# EAGLE board HighLevel (EAGLE 7.1.0)
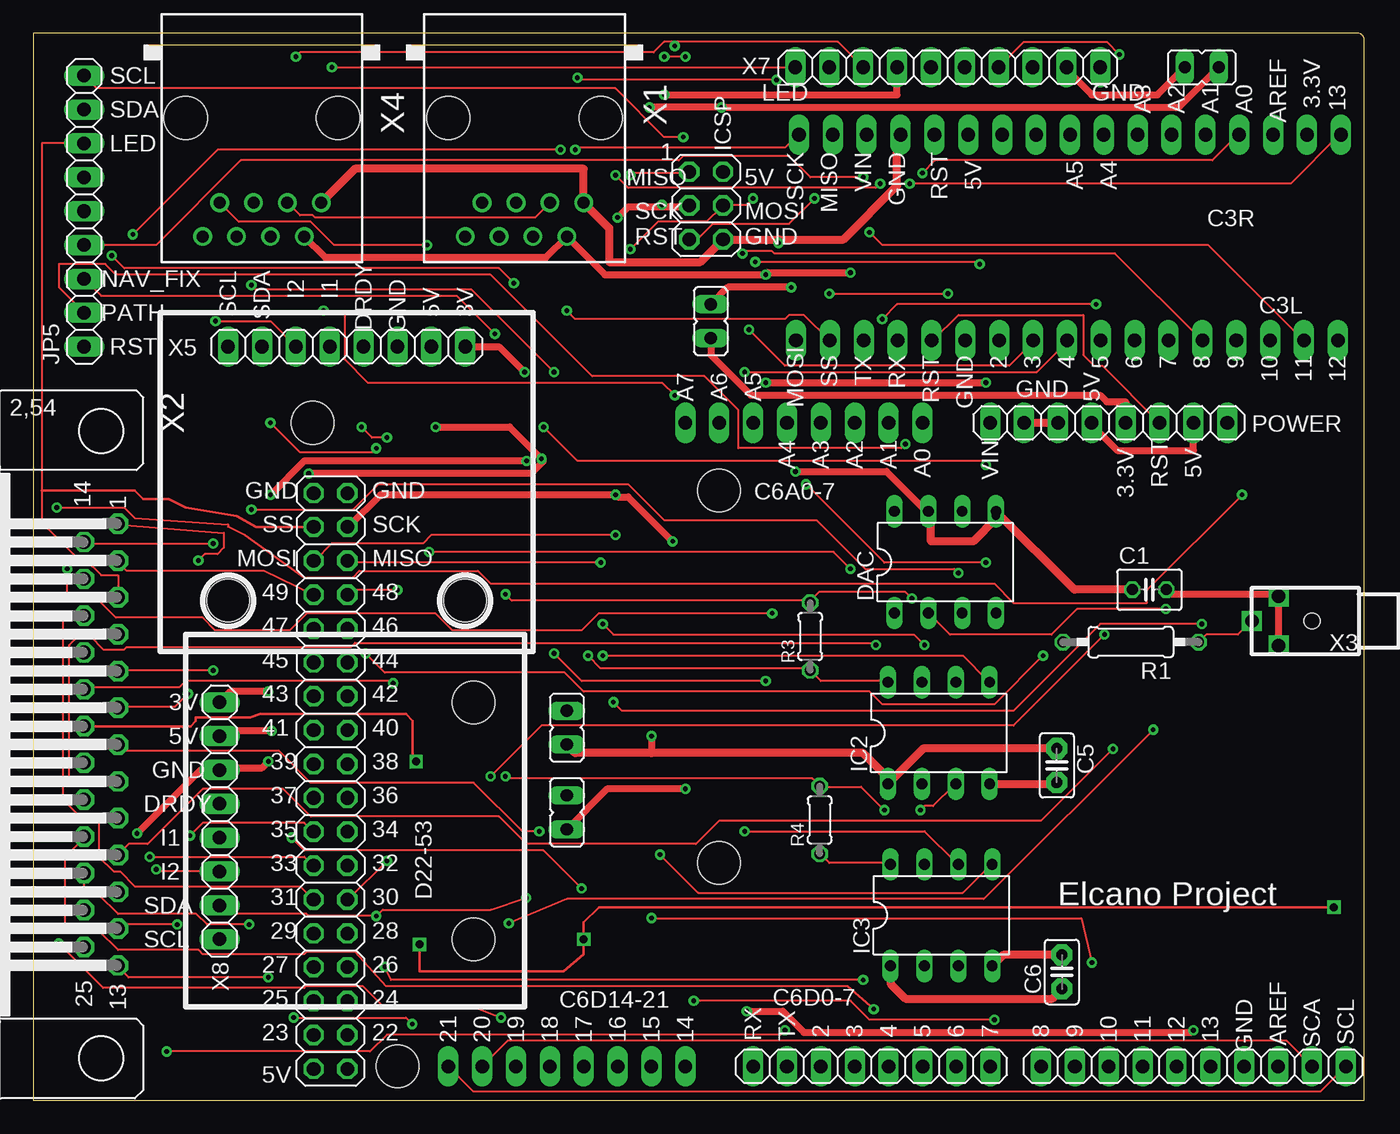
[diagram p0: board, top side]
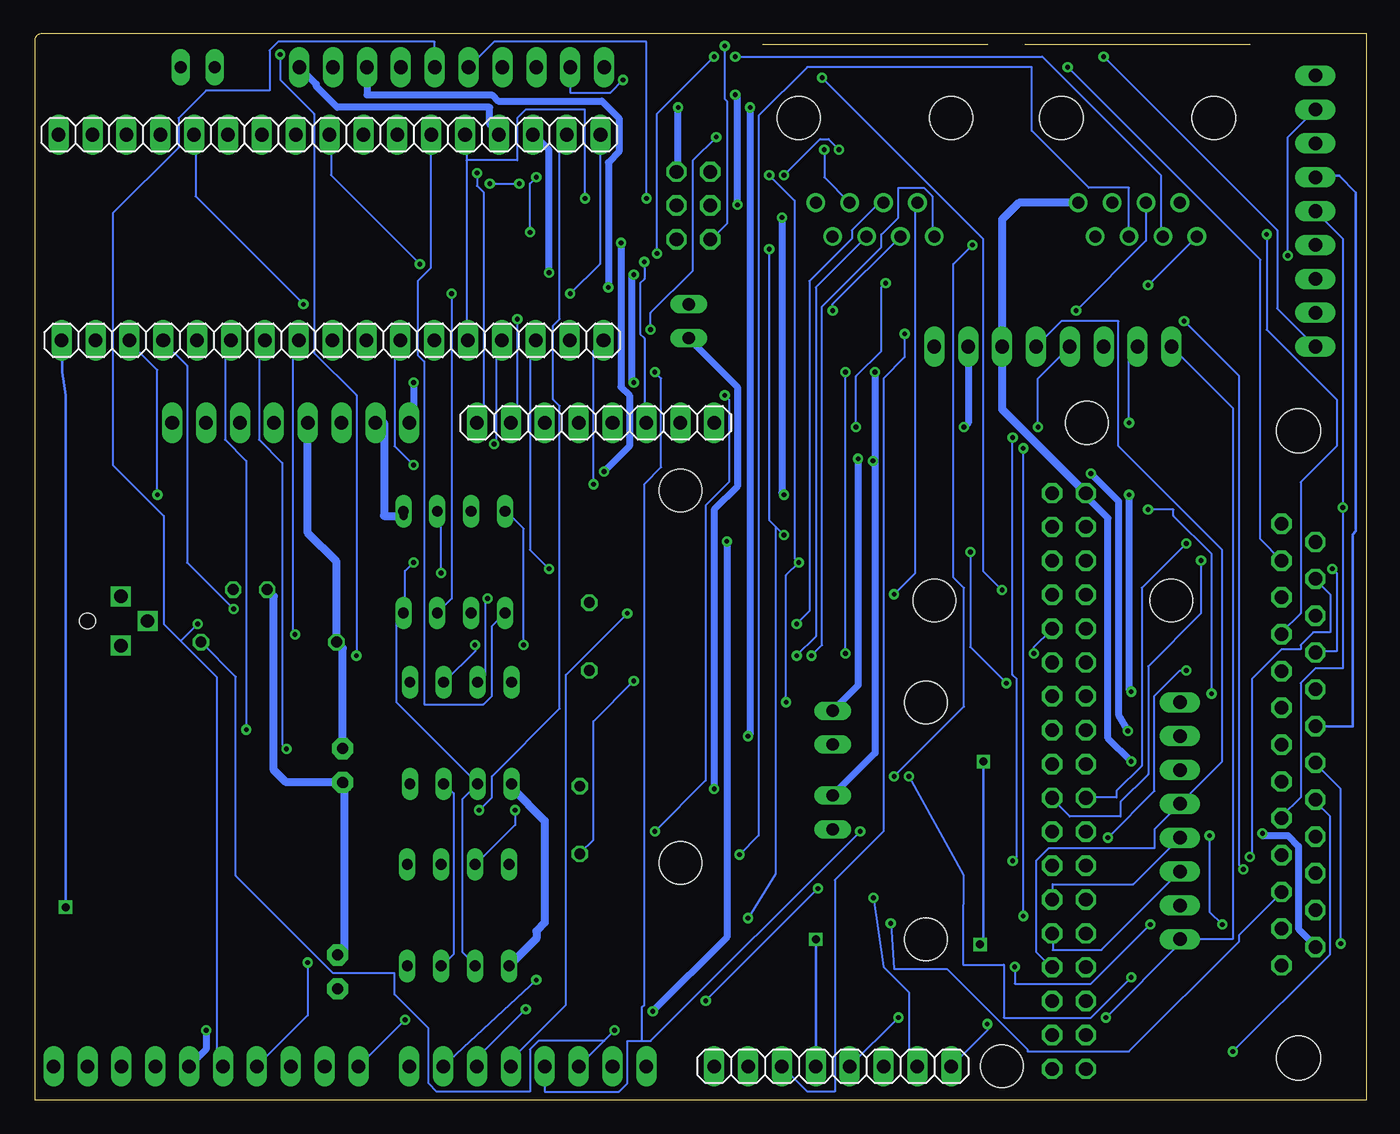
[diagram p1: board, bottom side, seen from below]

Size 99.82 x 80.01 mm. Coordinates in mm from the lower left corner, seen from the top.
Outline: 6.35,80 0,80 0,0 99.82,0 99.82,79.5 arc90 99.31,80.01 6.35,80
Copper layers (1*16): Top 0.0178mm / dielectric 59mil / Bottom 0.0178mm
Design rules "SSC-EAGLE-2Lyr_v1.0.0.3": minimum track width 6mil, minimum drill 14mil, track to track 6mil, track to pad 6mil, pad to pad 6mil, via to via 6mil, smd to smd 6mil, copper to edge 20mil, drill to drill 16mil, minimum pad ring 8mil, minimum via ring 8mil, stop-mask expansion 3mil, vias tented up to drill 0mil, thermal gap 10mil
Net classes: 0 default: width 0.152 mm, drill 0.305 mm, clearance 0.254 mm; 1 Power: width 0.508 mm, drill 0.305 mm, clearance 0.254 mm
Holes 3.2 mm at 20.95,50.8 27.3,2.54 51.44,17.78 51.44,45.72 32.38,37.47 14.61,37.47 33.02,29.84 33.02,12.06

## Footprints (pad centres in the part's own frame; a part is rotated, then mirrored left to right if it is on the bottom)
C025-030X050 = drill 0.813 octagon: 1 -1.27,0; 2 1.27,0
1X17 = drill 1.016 long: 1 -20.32,0; 2 -17.78,0; 3 -15.24,0; 4 -12.7,0; 5 -10.16,0; 6 -7.62,0; 7 -5.08,0; 8 -2.54,0; 9 0,0; 10 2.54,0; 11 5.08,0; 12 7.62,0; 13 10.16,0; 14 12.7,0; 15 15.24,0; 16 17.78,0; 17 20.32,0
C2.5-2 = drill 0.813 pad 1.6 octagon: 1 -1.27,0; 2 1.27,0
1X08 = drill 1.016 long: 1 -8.89,0; 2 -6.35,0; 3 -3.81,0; 4 -1.27,0; 5 1.27,0; 6 3.81,0; 7 6.35,0; 8 8.89,0
1X10 = drill 1.016 long: 1 -11.43,0; 2 -8.89,0; 3 -6.35,0; 4 -3.81,0; 5 -1.27,0; 6 1.27,0; 7 3.81,0; 8 6.35,0; 9 8.89,0; 10 11.43,0
2X18 = drill 1.016 octagon: 1 -21.59,-1.27; 2 -21.59,1.27; 3 -19.05,-1.27; 4 -19.05,1.27; 5 -16.51,-1.27; 6 -16.51,1.27; 7 -13.97,-1.27; 8 -13.97,1.27; 9 -11.43,-1.27; 10 -11.43,1.27; 11 -8.89,-1.27; 12 -8.89,1.27; 13 -6.35,-1.27; 14 -6.35,1.27; 15 -3.81,-1.27; 16 -3.81,1.27; 17 -1.27,-1.27; 18 -1.27,1.27; 19 1.27,-1.27; 20 1.27,1.27; 21 3.81,-1.27; 22 3.81,1.27; 23 6.35,-1.27; 24 6.35,1.27; 25 8.89,-1.27; 26 8.89,1.27; 27 11.43,-1.27; 28 11.43,1.27; 29 13.97,-1.27; 30 13.97,1.27; 31 16.51,-1.27; 32 16.51,1.27; 33 19.05,-1.27; 34 19.05,1.27; 35 21.59,-1.27; 36 21.59,1.27
DIL08 = drill 0.813 long: 1 -3.81,-3.81; 2 -1.27,-3.81; 3 1.27,-3.81; 4 3.81,-3.81; 5 3.81,3.81; 6 1.27,3.81; 7 -1.27,3.81; 8 -3.81,3.81
2X03 = drill 1.016 octagon: 1 -2.54,-1.27; 2 -2.54,1.27; 3 0,-1.27; 4 0,1.27; 5 2.54,-1.27; 6 2.54,1.27
JP1 = drill 0.914 long: 1 0,-1.27; 2 0,1.27
1X09 = drill 1.016 long: 1 -10.16,0; 2 -7.62,0; 3 -5.08,0; 4 -2.54,0; 5 0,0; 6 2.54,0; 7 5.08,0; 8 7.62,0; 9 10.16,0
0207/10 = drill 0.813 octagon: 1 -5.08,0; 2 5.08,0
0204/5 = drill 0.813 octagon: 1 -2.54,0; 2 2.54,0
RJ45-NO-SHIELD = drill 0.9 pad 1.4: 1 -4.445,6.35; 2 -3.175,8.89; 3 -1.905,6.35; 4 -0.635,8.89; 5 0.635,6.35; 6 1.905,8.89; 7 3.175,6.35; 8 4.445,8.89 | hole 3.251: -5.715,0; 5.715,0
M25H = drill 1.016 octagon: 1 -16.561,1.27; 2 -13.792,1.27; 3 -11.049,1.27; 4 -8.28,1.27; 5 -5.512,1.27; 6 -2.769,1.27; 7 0,1.27; 8 2.769,1.27; 9 5.512,1.27; 10 8.28,1.27; 11 11.049,1.27; 12 13.792,1.27; 13 16.561,1.27; 14 -15.189,-1.27; 15 -12.421,-1.27; 16 -9.652,-1.27; 17 -6.909,-1.27; 18 -4.14,-1.27; 19 -1.372,-1.27; 20 1.372,-1.27; 21 4.14,-1.27; 22 6.909,-1.27; 23 9.652,-1.27; 24 12.421,-1.27; 25 15.189,-1.27 | hole 3.302: 23.52,0; -23.52,0
ODO_JACK = drill 1 square: P$1 4.5,0; P$2 2.5,1.85; P$3 2.5,-1.85 | hole 1.2: 0,0

## Placement (x,y rotation side)
C1  1 uF  [C025-030X050]  83.69,38.29 0 top
C3L  Pilot digital  [1X17]  77.51,56.98 180 bottom
C3R  Pilot analog  [1X17]  77.73,72.41 180 bottom
C5  0.1uF  [C2.5-2]  76.75,25.11 270 top
C6  0.1uF  [C2.5-2]  77.13,9.62 90 top
C6A0-7  C6 Analog In 0-7  [1X08]  57.78,50.8 0 bottom
C6D0-7  GPS  [1X08]  62.87,2.54 180 top
C6D8-13  C6D8-13  [1X10]  87,2.54 180 top
C6D14-21  GPS  [1X08]  40.01,2.54 0 bottom
D22-53  High digital  [2X18]  22.29,23.94 90 top
DAC  MCP 4802  [DIL08]  68.39,40.35 0 top
IC2  DS 8291  [DIL08]  67.9,27.53 0 top
IC3  DS 8291  [DIL08]  68.09,13.88 0 top
ICSP  C6  [2X03]  50.45,67.09 270 top
JP1  5V_JP1  [JP1]  40.01,27.94 0 top
JP2  3V3_JP2  [JP1]  40.01,21.59 0 top
JP3  5V_JP3  [JP1]  87.63,77.47 90 top
JP4  3V3_JP4  [JP1]  50.8,58.42 0 top
JP5  C4 Mapper  [1X09]  3.81,66.67 90 top
POWER  C6 Power  [1X08]  80.64,50.8 0 top
R1  4.7 K  [0207/10]  82.3,34.35 180 top
R3  100  [0204/5]  58.26,34.78 90 top
R4  100  [0204/5]  58.97,21.02 90 top
X1  RJ45-8L-B  [RJ45-NO-SHIELD]  36.83,73.66 180 top
X2  Vehicle control  [M25H]  5.08,26.67 270 top
X3  2odo__  [ODO_JACK]  95.89,35.94 180 top
X4  RJ45-8L-B  [RJ45-NO-SHIELD]  17.14,73.66 180 top
X5  Compass  [1X08]  23.5,56.52 0 top
X7  Mouse  [1X10]  68.58,77.47 180 top
X8  Digital Compass  [1X08]  13.97,20.95 90 top

## Library data of the parts
C1 R1 = rcl
C3L C3R C6A0-7 C6D0-7 C6D8-13 C6D14-21 D22-53 ICSP JP5 POWER X5 X7 X8 = pinhead
C5 C6 = capacitor-wima
DAC IC2 IC3 = ic-package
JP1-JP4 = jumper
R3 R4 = resistor
X1 X4 = con-tycoelectronics; MF: TYCO ELECTRONICS; MPN: RJ45-8L-B; OC_FARNELL: 1279843; OC_NEWARK: 52K4445
X2 = con-subd; OC_FARNELL: unknown; OC_NEWARK: unknown
X3 = Elcano

## Nets
2TX6RX: C3L.17 C6D14-21.4 JP5.6 X2.19
3MISO: C3R.2 IC2.3 IC3.3
3MOSI: C3L.1 DAC.4 IC2.2 IC3.2
3SCK: C3R.1 DAC.3 X1.3 X4.3
3SCL: C3L.8 JP5.9
3SDA: C3L.7 JP5.8
3SS5R: C3L.13 X4.6
3SS_DAC: C3L.14 DAC.2
3TX2RX: C3L.3 X2.18
3V3 [Power]: JP2.1 JP4.1 POWER.5
3VLSM [Power]: JP2.2 X5.8 X8.8
5V_C3: C3R.6 DAC.1
5VLSM [Power]: JP1.2 X5.7 X8.7
6MISO: C6D8-13.6 D22-53.31 ICSP.1 X7.5
6MOSI: C6D8-13.7 D22-53.32 ICSP.4 X7.6
6SCL: C6D8-13.1 C6D14-21.8 X5.1 X8.1
6SDA: C6D8-13.2 C6D14-21.7 X5.2 X8.2
6TX2RX: C6D14-21.5 X2.20
+5V [Power]: C5.1 C6.1 IC2.1 IC3.1 ICSP.2 JP1.1 JP3.1 POWER.4 POWER.7 R1.2
A0: C3R.14 C6A0-7.1
A1: C3R.13 C6A0-7.2
A5: C3R.9 C6A0-7.6
ACK26: C6D0-7.4 X2.17
ACK34: C3L.15 JP5.5 X2.9
ACK43: C3L.16 JP5.4
ACK62: C6D0-7.3 X2.22
AUTREQ: C3L.9 C6D0-7.5 X2.7
CLICK: C6D0-7.6 R1.1 X2.21 X3.P$1
CRS_RVS: C3L.10 X2.13
CRSSTR: DAC.6 X2.6
CRSTHR: DAC.8 X2.8
D09: D22-53.18 X2.14
DRDY: D22-53.7 X5.5 X8.5
GND [Power]: C1.1 C3R.4 C5.2 C6.2 D22-53.36 DAC.5 DAC.7 IC2.4 IC3.4 ICSP.6 POWER.2 POWER.3 X1.1 X2.25 X4.1 X5.6 X7.1 X8.6
I1LSM: D22-53.11 X5.4 X8.4
I2LSM: D22-53.9 X5.3 X8.3
LED1: C6D8-13.10 X2.5
LED3: C3R.17 X2.4
LED4: D22-53.34 JP5.7 X2.3
LED5: D22-53.30 X2.2 X7.10
LED6: D22-53.17 X2.1
LED7: D22-53.14 X2.15
LED8: D22-53.12 X2.16
M3V [Power]: JP4.2 X7.3
M5V [Power]: JP3.2 X7.2
MANRQ: C3L.11 X2.10
MISO+: IC2.6 X1.5
MISO+R: IC3.6 X4.5
MISO-: IC2.5 X1.4
MISO-R: IC3.5 X4.4
MOSI+: IC2.8 R3.1 X1.8
MOSI+R: IC3.8 R4.1 X4.8
MOSI-: IC2.7 R3.2 X1.7
MOSI-R: IC3.7 R4.2 X4.7
N$4: C3L.2 X1.6
N$23 [Power]: C1.2 X3.P$2 X3.P$3
NAV_FIX: C6D14-21.3 JP5.3
NCS: D22-53.27 X7.4
NPO: D22-53.29 X7.9
PATH: C3L.4 JP5.2
RDY26: D22-53.16 X2.12
RDY32: C3L.12 X2.11
RDY62: C6D0-7.2 X2.23
RESET: C3L.5 C3R.5 ICSP.5 JP5.1 POWER.6 X7.8
SCLK [Power]: C6D8-13.5 D22-53.33 ICSP.3 X7.7
VIN [Power]: C3R.3 POWER.1 X1.2 X4.2

## Tracks (layer width: path | path; a pad name or v marks a point on that pad's centre or on a via)
2TX6RX  (via drill 0.6)
  Top 0.203: v97.54,14.48 42.42,14.48 41.27,13.34 v41.27,12.06 41.27,10.92 39.75,9.65 28.96,9.65 v28.96,11.68 | X2.19 11.79,28.04 12.19,28.45 12.19,28.7 16.26,28.7 17.02,28.96 27.94,28.96 28.45,28.45 28.45,25.65 v28.7,25.4
  Bottom 0.203: C6D14-21.4 v41.27,12.06 | v97.54,14.48 97.54,52.83 97.79,54.61 97.79,56.95 C3L.17 | X2.19 1.02,28.04 1.02,42.42 0.76,42.67 0.76,68.07 2.03,69.34 3.68,69.34 JP5.6 | v28.7,25.4 28.7,11.94 v28.96,11.68
3MISO  (via drill 0.36)
  Top 0.152: v66.52,21.75 66.83,22.07 67.47,22.07 69.06,23.65 IC2.3
  Bottom 0.152: IC3.3 69.22,10.16 68.42,10.95 68.42,23.02 69.06,23.65 IC2.3 | v66.52,21.75 65.56,22.7 65.56,24.29 60.48,29.37 60.48,52.07 60.96,52.55 60.96,58.1 60.48,58.58 60.48,71.91 60.01,72.39 C3R.2
3MOSI  (via drill 0.36)
  Top 0.152: v57.94,46.2 63.82,40.32 v71.44,40.32
  Bottom 0.152: IC3.2 66.83,10.16 67.79,11.11 67.79,22.54 66.67,23.65 IC2.2 66.67,23.81 72.71,29.84 72.71,36.04 72.23,36.51 DAC.4 72.07,36.67 72.07,39.69 v71.44,40.32 | v57.94,46.2 57.94,56.2 57.31,56.83 C3L.1
3SCK  (via drill 0.36)
  Top 0.152: X4.3 20,66.36 20.95,66.36 21.11,66.2 37.62,66.2 X1.3 | v59.69,60.48 v68.58,60.48 | v40.64,71.28 40.8,71.44 56.36,71.44 57.31,72.39 C3R.1
  Bottom 0.152: v68.58,60.48 68.58,37.62 69.53,36.67 DAC.3 | v59.69,60.48 57.47,62.71 57.47,72.39 C3R.1 | X1.3 40.64,69.22 v40.64,71.28
3SCL  (via drill 0.36)
  Top 0.152: JP5.9 4.76,75.88 43.66,75.88 47.31,72.23 v48.74,72.23 | v53.66,57.78 56.36,55.09 73.18,55.09 74.93,56.83 C3L.8
  Bottom 0.152: v48.74,72.23 50.48,70.48 50.48,62.23 53.66,59.05 v53.66,57.78
3SDA  (via drill 0.36)
  Top 0.152: v5.87,63.34 6.83,62.39 34.92,62.39 v36.04,61.28 | v38.26,50.48 40.8,47.94 71.12,47.94 v71.44,47.62
  Bottom 0.152: JP5.8 5.87,72.23 v5.87,63.34 | v36.04,61.28 36.35,60.96 36.35,56.2 38.26,54.29 v38.26,50.48 | v71.44,47.62 72.87,49.05 72.87,56.52 72.55,56.83 C3L.7
3SS5R  (via drill 0.36)
  Top 0.152: v48.9,78.26 v47.31,78.26 | v53.18,63.5 53.34,63.66 55.4,63.66 55.56,63.5 81.12,63.5 87.63,56.99 C3L.13
  Bottom 0.152: X4.6 15.4,64.93 15.4,69.37 24.29,78.26 v47.31,78.26 | v48.9,78.26 53.18,73.98 v53.18,63.5
3SS_DAC  (via drill 0.36)
  Top 0.152: v84.93,36.83 78.26,36.83 76.36,34.92 68.74,34.92 67.15,36.51 DAC.2
  Bottom 0.152: v84.93,36.83 88.42,40.32 88.42,55.09 90.17,56.83 C3L.14
3TX2RX  (via drill 0.36)
  Top 0.152: v26.99,31.27 26.83,31.43 11.43,31.43 10.95,30.96 3.81,30.96 X2.18 | v29.69,41.12 60.01,41.12 v61.28,39.85
  Bottom 0.152: v26.99,31.27 29.69,33.97 v29.69,41.12 | v61.28,39.85 62.71,41.27 62.71,56.52 62.39,56.83 C3L.3
3V3  (via drill 0.36)
  Top 0.508: JP2.1 43.02,23.34 v48.9,23.34 | POWER.5 81.92,52.39 80.49,52.39 80.01,52.86 53.82,52.86 50.8,55.88 JP4.1
  Bottom 0.508: v48.9,23.34 48.9,44.29 47.15,46.04 47.15,53.5 JP4.1
3VLSM  (via drill 0.36)
  Top 0.508: v36.83,54.61 34.92,56.52 X5.8 | X8.8 14.76,30.64 v17.62,30.64 | v17.78,45.4 20.32,47.94 v36.99,47.94
  Bottom 0.508: JP2.2 36.83,26.04 36.83,47.94 | v36.83,54.61 36.83,47.94 | v17.62,30.64 17.78,30.8 v17.78,45.4 | v36.99,47.94 36.83,47.94
5V_C3
  Bottom 0.152: DAC.1 64.61,36.51 65.56,35.56 65.56,30.32 66.2,29.69 70.64,29.69 70.64,55.4 71.12,55.88 71.12,61.44 70.17,62.39 70.17,72.39 C3R.6
5VLSM  (via drill 0.36)
  Top 0.508: v30.16,50.48 35.72,50.48 v38.1,48.1 38.26,47.94 37.31,46.99 v20.64,46.99 | X8.7 14.86,27.69 v17.88,27.69
  Bottom 0.508: JP1.2 38.1,31.11 v38.1,48.1 | v30.16,50.48 29.84,50.8 X5.7 | v17.88,27.69 18.57,28.89 18.57,44.93 v20.64,46.99
6MISO  (via drill 0.36)
  Top 0.152: v42.55,40.32 23.65,40.32 D22-53.31 | v44.77,69.37 44.93,69.53 49.05,69.53 ICSP.1 | v43.5,29.84 44.13,29.21 73.5,29.21 80.01,35.72 v87.63,35.72
  Bottom 0.152: v44.77,69.37 42.86,67.47 42.86,40.64 v42.55,40.32 43.5,39.37 v43.5,29.84 | C6D8-13.6 86.2,3.02 86.2,31.75 88.9,34.45 | 88.9,34.45 90.17,35.72 90.17,43.81 93.98,47.62 93.98,66.52 89.06,71.44 89.06,73.66 87,75.72 82.23,75.72 82.23,78.74 81.6,79.38 69.85,79.38 X7.5 | 88.9,34.45 v87.63,35.72
6MOSI  (via drill 0.36)
  Top 0.152: v43.66,42.39 29.84,42.39 29.21,41.75 22.38,41.75 21.11,40.48 D22-53.32 | v44.77,63.82 46.83,65.88 50.48,65.88 51.59,66.99 ICSP.4 51.75,67.15 53.5,67.15 v53.98,67.63 | v79.38,10.32 78.58,13.65 v46.35,13.65
  Bottom 0.152: 44.29,43.02 44.77,43.5 v44.77,63.82 | 44.29,43.02 v43.66,42.39 | C6D8-13.7 79.38,6.35 v79.38,10.32 | v46.35,13.65 44.29,16.99 44.29,43.02 | X7.6 65.41,79.38 53.98,79.38 v53.98,67.63
6SCL  (via drill 0.36)
  Top 0.152: C6D8-13.1 96.52,0.64 33.02,0.64 C6D14-21.8 | v28.42,5.71 27.94,6.19 v19.53,6.19
  Bottom 0.152: X5.1 10,51.91 10,12.06 X8.1 13.97,11.75 v19.53,6.19 | C6D14-21.8 28.42,5.24 v28.42,5.71
6SDA  (via drill 0.36)
  Top 0.152: C6D8-13.2 93.98,4.45 35.56,4.45 C6D14-21.7 | X8.2 14.61,13.97 20.48,13.97 20.64,13.81 v25.72,13.81 26.19,14.29 34.29,14.29 v36.96,15.18 | v17.78,50.8 20,48.58 25.4,48.58 v25.72,48.9
  Bottom 0.152: X5.2 17.78,55.88 v17.78,50.8 | v25.72,13.81 v25.72,48.9 | C6D14-21.7 34.29,3.17 34.29,8.1 36.2,10 v36.96,15.18
6TX2RX  (via drill 0.36)
  Top 0.152: v1.91,11.75 5.24,8.41 20.32,8.41 20.48,8.57 24.7,8.57 26.16,7.11 32.96,7.05 v35.08,6.19
  Bottom 0.152: v1.91,11.75 1.91,23.34 3.81,25.24 X2.20 | v35.08,6.19 C6D14-21.5
+5V  (via drill 0.36)
  Top 0.508: POWER.7 87,48.74 81.28,48.74 79.38,50.64 POWER.4 | JP3.1 85.88,74.45 v51.59,74.45 v46.2,74.45 | v46.35,27.3 46.35,26.04
  Top 0.61: C5.1 66.75,26.38 IC2.1 64.09,24.17 62.23,26.04 46.35,26.04 40.64,26.04 JP1.1 | IC3.1 64.28,8.74 65.41,7.62 76.4,7.62 C6.1
  Bottom 0.508: v51.59,74.45 51.59,69.69 ICSP.2 | v46.35,27.3 46.2,27.46 v46.2,74.45
  Bottom 0.61: C5.1 76.75,33.89 R1.2 77.22,40.39 79.38,42.55 POWER.4 | IC2.1 64.09,23.45 61.59,20.95 61.59,13.34 62.23,12.7 62.23,12.12 IC3.1
A0  (via drill 0.36)
  Top 0.152: v66.67,69.53 67.63,70.48 88.42,70.48 90.33,72.39 C3R.14
  Bottom 0.152: C6A0-7.1 66.2,51.28 66.2,68.1 66.67,68.58 v66.67,69.53
A1  (via drill 0.36)
  Top 0.152: v63.66,58.58 64.77,59.69 v79.69,59.69
  Bottom 0.152: C6A0-7.2 63.66,51.28 v63.66,58.58 | v79.69,59.69 87.79,67.79 87.79,72.39 C3R.13
A5  (via drill 0.36)
  Top 0.152: v54.13,62.87 70.8,62.87 v70.96,62.71
  Bottom 0.152: C6A0-7.6 54.13,50.96 54.13,57.15 54.45,57.47 54.45,61.28 54.13,61.59 v54.13,62.87 | v70.96,62.71 77.63,69.37 77.63,72.39 C3R.9
ACK26  (via drill 0.36)
  Top 0.152: v2.54,39.85 2.54,37.47 4.92,37.47 6.19,36.2 12.7,36.2 13.65,35.24 19.21,35.24 20.48,36.51 30.16,36.51 31.43,35.24 41.12,35.24 42.39,36.51 v55.4,36.51
  Bottom 0.152: v2.54,39.85 2.22,39.53 2.22,33.66 3.81,33.66 X2.17 | v55.4,36.51 60.01,31.91 60.01,7.14 64.14,3.02 C6D0-7.4
ACK34  (via drill 0.36)
  Top 0.152: v90.65,45.4 83.5,38.26 83.5,37.31 73.5,37.31 72.07,38.73 34.29,38.73 33.34,39.69 24.45,39.69 23.97,39.21 20.32,39.21 15.88,42.39 14.61,43.02 14.61,43.18 7.62,43.66 6.83,44.45 v1.75,44.45
  Bottom 0.152: JP5.5 1.75,64.61 v1.75,44.45 1.75,32.38 3.81,32.38 4.92,31.27 4.92,22.7 6.35,21.27 X2.9 | v90.65,45.4 90.65,54.77 92.71,56.83 C3L.15
ACK43  (via drill 0.36)
  Top 0.152: JP5.4 9.21,64.14 15.56,70.48 48.42,70.48 48.74,70.8 56.67,70.8 58.26,69.22 v62.23,69.22 | v62.71,65.09 63.66,64.14 88.11,64.14 95.25,56.99 C3L.16
  Bottom 0.152: v62.23,69.22 62.71,68.74 v62.71,65.09
ACK62  (via drill 0.36)
  Top 0.152: v63.02,6.83 61.05,8.54 26.45,8.54 24.13,11.11 20.48,11.11 20.32,10.95 12.7,10.95 12.38,11.27 6.35,11.27 4.92,12.7 2.38,12.7 2.38,18.26 3.81,19.68 X2.22
  Bottom 0.152: v63.02,6.83 66.67,3.17 C6D0-7.3
AUTREQ  (via drill 0.36)
  Top 0.152: X2.7 6.83,26.19 18.41,26.19 20.8,23.81 33.02,23.81 36.67,20.16 v37.94,20.16 | v53.34,54.61 75.25,54.61 77.47,56.83 C3L.9
  Bottom 0.152: v37.94,20.16 53.66,4.45 54.29,4.45 | 54.29,4.45 55.4,4.45 55.4,1.27 56.04,0.64 61.59,0.64 C6D0-7.5 | v53.34,54.61 52.86,54.13 52.86,47.47 54.13,46.2 54.13,7.14 54.29,6.99 54.29,4.45
CLICK  (via drill 0.36)
  Top 0.152: R1.1 87.95,34.92 90.33,34.92 91.28,35.88 X3.P$1 | v10,3.65 25.24,3.65 26.51,4.92 56.04,4.92 v56.36,5.24
  Bottom 0.152: v10,3.65 2.7,10.95 2.7,21.27 3.81,22.38 X2.21 | C6D0-7.6 57.15,4.45 | 57.15,4.45 v56.36,5.24 | R1.1 84.77,31.75 84.77,16.83 77.47,9.53 72.87,9.53 72.87,7.94 70.33,5.4 70.33,1.27 69.69,0.64 62.71,0.64 62.71,3.81 62.07,4.45 57.15,4.45
CRS_RVS  (via drill 0.36)
  Top 0.152: v17.62,9.21 7.14,9.21 6.35,10 X2.13 | v34.29,24.29 38.1,28.1 73.5,28.1 v80.33,34.92
  Bottom 0.152: v17.62,9.21 20.64,6.19 27.18,6.19 27.18,10.16 30.23,10.16 30.23,12.45 30.19,16.89 v34.29,24.29 | v80.33,34.92 80.49,35.08 80.49,56.52 80.17,56.83 C3L.10
CRSSTR  (via drill 0.36)
  Top 0.152: v69.37,39.53 69.06,39.85 62.39,39.85 58.74,43.5 47.31,43.5 44.61,46.2 25.88,46.2 23.97,44.29 v16.35,44.29 | v11.59,30.48 10.64,29.53 6.35,29.53 X2.6
  Bottom 0.152: v69.37,39.53 69.37,43.97 69.53,44.13 DAC.6 | v16.35,44.29 14.45,44.29 14.45,43.81 11.59,40.96 v11.59,30.48
CRSTHR  (via drill 0.36)
  Top 0.152: v63.18,34.13 63.02,34.29 24.13,34.29 23.81,33.97 6.99,33.97 6.83,33.81 5.24,33.81 4.29,34.77 3.33,34.77 2.7,34.13 2.7,23.97 6.35,23.97 X2.8
  Bottom 0.152: v63.18,34.13 63.18,42.86 64.45,44.13 DAC.8
D09  (via drill 0.36)
  Top 0.152: v13.49,41.75 3.81,41.75 X2.14
  Bottom 0.152: v13.49,41.75 16.83,38.42 16.83,25.08 18.73,23.18 18.73,22.7 20.95,22.7 D22-53.18
DRDY
  Bottom 0.152: D22-53.7 23.65,10 24.77,11.11 24.77,17.94 23.81,18.89 15.88,18.89 15.88,20.32 X8.5 10.79,25.4 10.79,41.27 18.57,49.05 18.57,58.42 22.86,58.42 X5.5
GND  (via drill 0.36, 0.6)
  Top 0.508: v7.78,20 12.54,24.77 X8.6 14.13,24.92 17.14,24.92 v17.62,25.4 | v57.15,47.15 63.98,47.15 66.83,44.29 DAC.7 | v55.88,64.29 55.88,64.55
  Top 0.61: C3R.4 64.77,72.15 64.77,68.58 60.74,64.55 55.88,64.55 ICSP.6 50.03,62.87 43.18,62.87 43.18,65.41 X1.1 41.27,69.85 24.13,69.85 X4.1 | C1.1 78.07,38.29 DAC.5 | v72.2,43.81 72.2,43.62 70.48,41.91 67.31,41.91 67.31,43.97 DAC.7 | IC2.4 v76.64,23.72 C5.2 | C6.2 72.73,10.89 IC3.4 | POWER.3 POWER.2
  Bottom 0.508: X7.1 78.74,76.2 78.74,76.04 77.15,74.45 65.72,74.45 65.72,73.18 65.09,72.55 C3R.4 | v7.78,20 7.78,19.84 5.87,19.84 5.08,19.05 5.08,12.86 3.81,11.59 X2.25 | v17.62,25.4 19.37,27.15 19.37,43.66 20.95,45.24 D22-53.36 | v57.15,47.15 55.24,49.05 55.24,52.86 55.88,53.5 v55.88,64.29
  Bottom 0.61: POWER.2 73.66,50.8 73.66,43.81 v72.2,43.81 DAC.5 | X4.1 26.04,67.31 27.3,66.04 X5.6 27.3,51.82 D22-53.36 20.83,45.72 | C5.2 80.98,23.84 81.92,24.77 81.92,37.78 C1.1 | v76.64,23.72 76.64,11.38 C6.2
I1LSM  (via drill 0.36)
  Top 0.152: v24.61,50.48 25.4,49.69 v26.51,49.69 | v26.51,17.94 23.65,15.08 D22-53.11
  Bottom 0.152: X8.4 17.46,16.19 23.5,16.19 23.5,15.08 D22-53.11 | X5.4 24.61,54.13 v24.61,50.48 | v26.51,49.69 26.51,31.91 26.19,31.59 26.19,18.26 v26.51,17.94
I2LSM  (via drill 0.36)
  Top 0.152: X5.3 17.78,58.42 v13.65,58.42 | v9.21,17.3 9.37,17.14 X8.3
  Bottom 0.152: X8.3 19.84,11.27 23.5,11.27 23.5,12.38 D22-53.9 | v13.65,58.42 9.53,54.29 9.53,17.62 v9.21,17.3
LED1  (via drill 0.36)
  Top 0.152: v13.49,32.23 6.35,32.23 X2.5 | v19.37,19.68 20.32,18.73 38.26,18.73 v41.12,15.88 | v49.53,7.46 61.28,7.46 62.71,6.03 v72.07,6.03
  Bottom 0.152: v13.49,32.23 13.97,32.23 15.88,30.32 15.88,23.18 v19.37,19.68 | v49.53,7.46 v41.12,15.88 | C6D8-13.10 v72.07,6.03
LED3  (via drill 0.36)
  Top 0.152: v7.46,64.93 13.81,71.28 v39.53,71.28 | v43.66,69.37 44.61,68.42 63.18,68.42 v63.5,68.74 | v65.72,68.74 94.3,68.74 97.95,72.39 C3R.17
  Bottom 0.152: v7.46,64.93 7.46,57.78 2.22,52.55 2.22,49.05 4.92,46.35 4.92,36.51 6.35,35.08 X2.4 | v39.53,71.28 40.32,72.07 40.96,72.07 v43.66,69.37 | v65.72,68.74 v63.5,68.74
LED4
  Top 0.152: X2.3 6.35,39.37 5.08,39.37 3.81,40.64 3.33,40.64 0.64,43.34 0.64,45.72 0.64,71.75 JP5.7
  Top 0.203: D22-53.34 16.7,42.99 15.24,43.81 11.43,44.45 10.16,45.09 8.26,45.09 7.62,45.72 0.64,45.72
LED5  (via drill 0.36)
  Top 0.152: X2.2 6.35,40.32 6.99,39.69 17.3,39.69 20.95,37.94 D22-53.30 | v22.38,77.47 X7.10
  Bottom 0.152: v22.38,77.47 7.94,63.02 7.94,42.07 6.35,40.48 X2.2
LED6  (via drill 0.36)
  Top 0.152: v12.38,40.48 12.86,40.96 13.81,40.96 14.29,41.43 14.29,42.55 6.35,43.18 X2.1
  Bottom 0.152: v12.38,40.48 12.38,36.51 16.35,32.54 16.35,24.45 18.41,22.38 18.41,21.27 22.23,21.27 23.5,22.54 D22-53.17
LED7  (via drill 0.36)
  Top 0.152: v8.73,18.26 20.32,18.26 20.95,17.62 D22-53.14
  Bottom 0.152: v8.73,18.26 8.57,18.41 8.57,31.59 6.35,33.81 4.92,33.81 4.92,34.13 3.97,35.08 2.7,35.08 2.7,37.94 3.81,39.05 X2.15
LED8
  Top 0.152: D22-53.12 20.95,15.08 20,16.03 7.62,16.03 6.51,17.14 6.03,17.14 4.92,18.26 4.92,21.43 3.33,21.43 2.22,22.54 2.22,36.2 3.81,36.2 X2.16
M3V  (via drill 0.36)
  Top 0.508: JP4.2 52.07,60.96 v56.83,60.96
  Bottom 0.508: v56.83,60.96 56.83,70.33 56.04,71.12 56.04,73.66 57.31,74.93 65.09,74.93 65.56,75.41 74.93,75.41 X7.3
M5V
  Top 0.508: JP3.2 84.3,75.41 79.38,75.41 77.47,77.31 X7.2
MANRQ  (via drill 0.36)
  Top 0.152: v80.96,26.35 75.56,20.95 51.44,20.95 49.69,19.21 36.99,19.21 34.92,21.27 20.8,21.27 18.73,23.34 12.7,23.34 8.57,19.21 7.14,19.21 6.35,18.41 X2.10
  Bottom 0.152: v80.96,26.35 81.28,26.67 81.28,47.78 83.03,49.53 83.03,56.52 82.71,56.83 C3L.11
MISO+  (via drill 0.36)
  Top 0.152: v66.83,34.13 66.04,34.92 43.5,34.92 v42.7,35.72
  Bottom 0.152: v66.83,34.13 66.83,33.66 69.06,31.43 IC2.6 | v42.7,35.72 41.75,36.67 41.75,61.44 38.58,64.61 38.58,65.25 36.51,67.31 X1.5
MISO+R  (via drill 0.36)
  Top 0.152: v53.34,20.16 66.83,20.16 69.22,17.78 IC3.6 | v48.1,52.86 47.15,53.82 25.08,53.82 23.34,55.56 23.34,59.21 v21.75,59.21
  Bottom 0.152: v53.34,20.16 49.53,23.97 49.53,44.61 47.78,46.35 47.78,52.55 v48.1,52.86 | v21.75,59.21 16.51,64.45 X4.5
MISO-  (via drill 0.36)
  Top 0.152: v42.7,33.34 69.69,33.34 71.6,31.43 IC2.5
  Bottom 0.152: v42.7,33.34 41.27,34.77 41.27,60.96 X1.4
MISO-R  (via drill 0.36)
  Top 0.152: v46.99,18.41 49.85,15.56 69.69,15.56 71.75,17.62 IC3.5
  Bottom 0.152: v46.99,18.41 45.56,19.84 45.56,73.82 41.91,77.47 25.08,77.47 25.08,72.71 20.8,68.42 17.78,68.42 X4.4
MOSI+  (via drill 0.36)
  Top 0.152: IC2.8 63.98,31.43 59.05,31.43 58.26,32.23 R3.1 58.1,32.38 42.55,32.38 v41.59,33.34
  Bottom 0.152: X1.8 32.54,64.93 32.54,67.79 33.18,68.42 35.08,68.42 35.08,66.2 36.35,64.93 36.35,63.98 40.8,59.53 40.8,34.13 v41.59,33.34
MOSI+R  (via drill 0.36)
  Top 0.152: R4.1 59.05,18.41 59.69,17.78 64.14,17.78 IC3.8 | v16.35,61.12 16.67,60.8 32.86,60.8 v39.05,54.61 | v39.05,33.5 41.12,31.43 v54.93,31.43
  Bottom 0.152: v16.35,61.12 X4.8 | v39.05,33.5 v39.05,54.61 | v54.93,31.43 57.94,28.42 57.94,19.53 58.9,18.57 R4.1
MOSI-  (via drill 0.36)
  Top 0.152: v65.88,37.62 65.41,38.1 58.9,38.1 58.26,37.47 R3.2 58.1,37.47 35.88,37.47 v35.4,37.94
  Bottom 0.152: v65.88,37.62 66.04,37.47 66.04,31.91 66.52,31.43 IC2.7 | X1.7 33.81,67.15 33.81,39.53 v35.4,37.94
MOSI-R  (via drill 0.36)
  Top 0.152: v63.82,21.75 62.07,23.5 59.05,23.5 R4.2 58.9,23.65 58.42,24.13 35.56,24.13 v35.4,24.29 | X4.7 15.4,65.88 20.8,65.88 22.54,64.14 v29.53,64.14
  Bottom 0.152: v63.82,21.75 63.82,20.64 66.67,17.78 IC3.7 | v29.53,64.14 30.96,62.71 30.96,39.21 30.16,38.42 30.16,29.53 v35.4,24.29
N$4  (via drill 0.36)
  Top 0.152: v40.01,59.21 40.64,58.58 56.36,58.58 56.67,58.9 57.78,58.9 59.69,56.99 C3L.2
  Bottom 0.152: X1.6 40.01,59.69 v40.01,59.21
N$23
  Top 0.508: C1.2 85.09,38.26 85.41,37.94 93.34,37.94 X3.P$3 93.34,37.62 93.34,34.13 X3.P$2
NAV_FIX  (via drill 0.36)
  Top 0.152: v34.61,57.47 31.75,60.33 5.08,60.33 JP5.3
  Bottom 0.152: v34.61,57.47 34.61,55.72 36.2,54.13 36.2,20.16 39.85,16.51 39.85,0.64 41.91,0.64 C6D14-21.3
NCS  (via drill 0.36)
  Top 0.152: v24.92,33.5 26.35,32.07 39.85,32.07 41.27,30.64 62.71,30.64 63.66,29.69 72.07,29.69 v75.72,33.34 | v81.44,78.42 80.49,79.38 74.3,79.38 X7.4
  Bottom 0.152: v24.92,33.5 24.92,33.97 23.65,35.24 D22-53.27 | v75.72,33.34 75.72,52.86 78.9,56.04 78.9,73.98 81.44,76.52 v81.44,78.42
NPO  (via drill 0.36)
  Top 0.152: v27.3,38.26 23.97,38.26 23.65,37.94 D22-53.29 | v40.8,76.68 40.96,76.52 v55.72,76.52
  Bottom 0.152: v27.3,38.26 28.73,39.69 28.73,64.61 v40.8,76.68 | v55.72,76.52 56.67,75.56 59.69,75.56 X7.9
PATH  (via drill 0.36)
  Top 0.152: JP5.2 1.91,60.96 1.91,62.71 5.4,62.71 6.19,61.91 34.29,61.91 41.91,54.29 50.32,54.29 52.86,51.75 52.86,48.9 65.09,48.9 v65.41,49.21
  Bottom 0.152: v65.41,49.21 65.25,49.37 65.25,56.52 64.93,56.83 C3L.4
RDY26  (via drill 0.36)
  Top 0.152: v10.79,13.18 6.51,13.18 6.35,13.02 X2.12 | v11.75,19.84 12.7,20.8 20.32,20.8 20.95,20.16 D22-53.16
  Bottom 0.152: v10.79,13.18 11.75,14.13 v11.75,19.84
RDY32  (via drill 0.36)
  Top 0.152: v35.66,13.27 40.01,15.08 71.28,15.08 v83.98,27.78
  Bottom 0.152: v35.66,13.27 35.4,9.84 31.43,9.84 25.4,3.81 25.4,3.65 17.78,3.65 9.53,11.91 9.53,12.38 6.35,15.56 X2.11 | v83.98,27.78 83.98,47.94 85.57,49.53 85.57,56.52 85.25,56.83 C3L.12
RDY62  (via drill 0.36)
  Top 0.152: X2.23 3.81,15.4 4.92,15.4 6.35,13.97 12.22,13.97 13.02,13.18 v16.19,13.18 | v26.35,10 26.83,9.02 v62.23,9.02
  Bottom 0.152: v16.19,13.18 20.64,8.73 26.35,8.73 v26.35,10 | C6D0-7.2 v62.23,9.02
RESET  (via drill 0.36)
  Top 0.152: POWER.6 80.17,55.09 79.53,55.09 78.74,55.88 78.74,58.9 69.37,58.9 67.47,56.99 C3L.5 | v19.68,78.26 20,78.58 46.51,78.58 47.31,79.38 48.1,79.38 | 48.1,79.38 60.33,79.38 X7.8 | 48.1,79.38 v48.1,79.06 | v58.58,67.63 56.67,65.72 50.96,65.72 49.85,64.61 49.21,64.61 ICSP.5
  Bottom 0.152: 67.47,70.48 67.47,72.39 C3R.5 | 67.47,70.48 67.47,56.99 C3L.5 | JP5.1 6.67,59.37 6.67,65.25 v19.68,78.26 | v48.1,79.06 48.1,75.09 47.94,74.93 47.94,65.72 49.05,64.61 ICSP.5 | 67.47,70.48 63.66,70.48 63.66,73.66 63.02,74.3 58.58,74.3 v58.58,67.63
SCLK  (via drill 0.36)
  Top 0.508: v43.81,66.2 44.61,66.99 47.15,66.99 | 47.15,66.99 49.05,66.99 ICSP.3 | D22-53.33 23.65,43.02 26.04,45.4 v43.66,45.4 43.81,45.24 44.61,45.24 v47.94,41.91 | v87,5.24 86.84,5.08 57.78,5.08 56.2,6.67 v53.5,6.67 | X7.7 64.77,75.41 v47.31,75.41 | v47.15,67.15 47.15,66.99
  Bottom 0.508: v43.66,45.4 43.81,45.56 v43.81,66.2 | C6D8-13.5 87,3.81 v87,5.24 | v53.5,6.67 47.94,12.22 v47.94,41.91 | v47.31,75.41 47.15,75.25 v47.15,67.15
VIN  (via drill 0.36)
  Top 0.508: X4.2 21.91,63.18 38.42,63.18 X1.2 42.86,61.91 v54.93,61.91 55.09,62.07 v61.28,62.07 | v54.93,53.82 v71.44,53.82
  Bottom 0.508: POWER.1 71.44,51.12 v71.44,53.82 | v54.93,53.82 55.09,53.98 55.09,61.75 v54.93,61.91 | v61.28,62.07 61.28,71.28 62.39,72.39 C3R.3

## Text on the board
tPlace: Elcano Project
tNames: AREF | 3.3V | SCL | A3 | A2 | A1 | A0 | 13 | LED | GND | SDA | LED | SCK | MISO | VIN | GND | RST | 1 | 5V | A5 | A4 | MISO | 5V | SCK | MOSI | RST | GND | DRDY | SCL | SDA | I2 | I1 | GND | NAV_FIX | 5V | 3V | PATH | MOSI | RST | SS | TX | RX | RST | GND | 2 | 3 | 4 | 5 | 6 | 7 | 8 | 9 | 10 | 11 | 12 | A7 | A6 | A5 | 5V | GND | A4 | A3 | A2 | A1 | VIN | RST | A0 | 3.3V | 5V | GND | GND | SS | SCK | MOSI | MISO | 49 | 48 | 47 | 46 | 45 | 44 | 43 | 42 | 3V | 5V | 41 | 40 | 39 | 38 | GND | DRDY | 37 | 36 | 35 | 34 | I1 | I2 | 33 | 32 | 31 | 30 | SDA | 29 | 28 | SCL | 27 | 26 | AREF | GND | SCA | SCL | 25 | 24 | 21 | 20 | 19 | 18 | 17 | 16 | 15 | 14 | 2 | 3 | 4 | 5 | 6 | 7 | 8 | 9 | 10 | 11 | 12 | 13 | 23 | 22 | RX | TX | 5V